# EAGLE board metaboard (EAGLE 5.10)
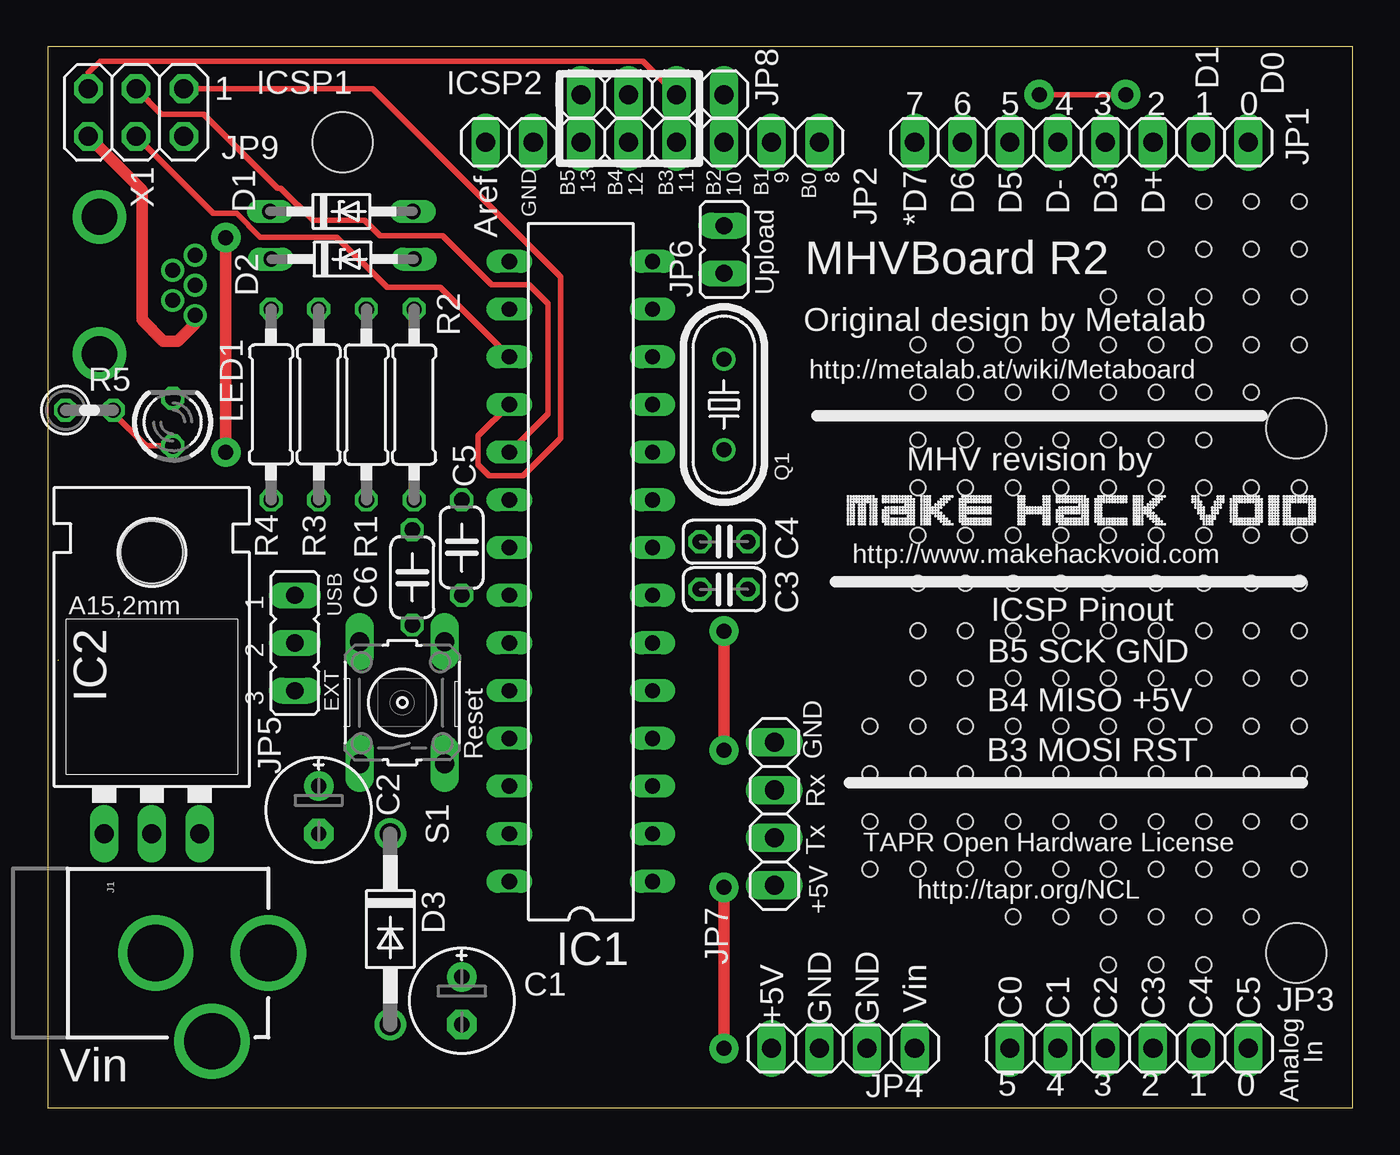
[diagram p0: board, top side]
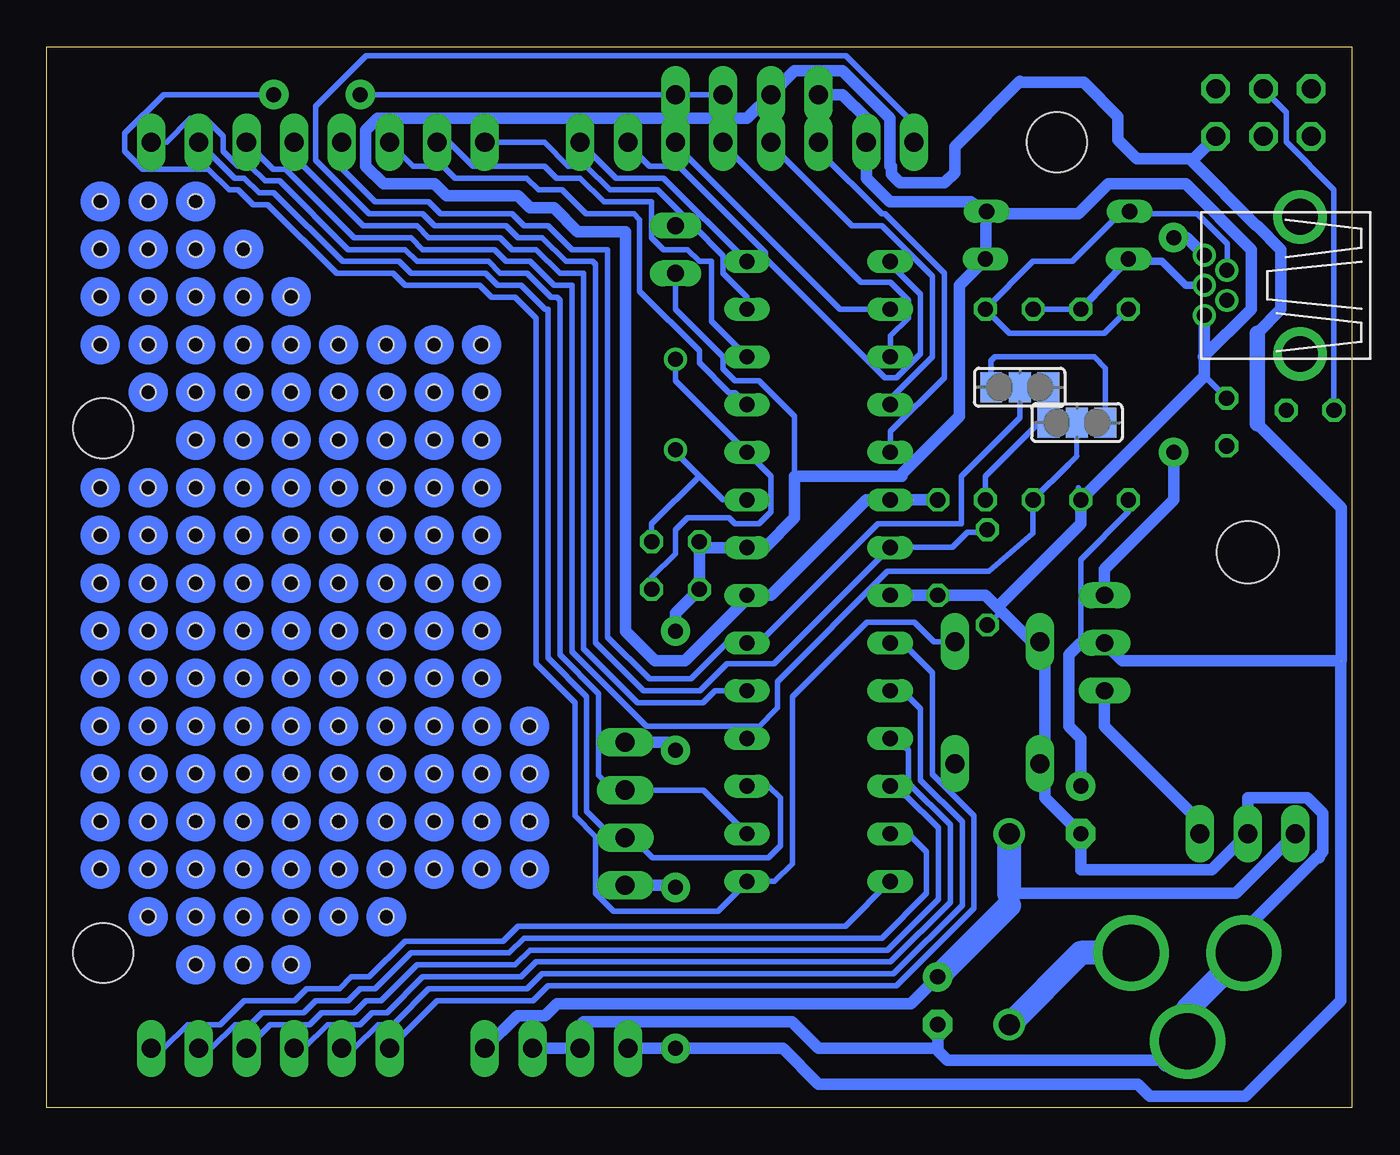
[diagram p1: board, bottom side, seen from below]

Size 69.52 x 56.51 mm. Coordinates in mm from the lower left corner, seen from the top.
Outline: 0,0 69.52,0 69.52,56.5 0,56.5 0,0
Copper layers (1*16): Top 0.035mm / dielectric 1.5mm / Bottom 0.035mm
Design rules "mine *": minimum track width 12mil, minimum drill 31mil, track to track 8mil, track to pad 8mil, pad to pad 8mil, via to via 8mil, smd to smd 8mil, copper to edge 10mil, drill to drill 20mil, minimum pad ring 8mil, minimum via ring 15mil, stop-mask expansion 4mil, vias tented up to drill 0mil, thermal gap 10mil
Holes 3.2 mm at 66.51,36.19 66.51,8.25 15.71,51.43
Holes 0.8 mm at 56.51,40.65 59.05,40.65 61.59,40.65 64.13,40.65 64.13,43.19 61.59,43.19 59.05,43.19 56.51,43.19 59.05,45.73 61.59,45.73 64.13,45.73 64.13,48.27 61.59,48.27 56.51,30.49 59.05,30.49 61.59,30.49 64.13,30.49 64.13,33.03 61.59,33.03 59.05,33.03 56.51,33.03 56.51,35.57 59.05,35.57 61.59,35.57 64.13,38.11 61.59,38.11 59.05,38.11 56.51,38.11 56.51,20.33 59.05,20.33 61.59,20.33 64.13,20.33 64.13,22.87 61.59,22.87 59.05,22.87 56.51,22.87 56.51,25.41 59.05,25.41 61.59,25.41 64.13,25.41 64.13,27.95 61.59,27.95 59.05,27.95 56.51,27.95 56.51,10.17 59.05,10.17 61.59,10.17 64.13,10.17 64.13,12.71 61.59,12.71 59.05,12.71 56.51,12.71 56.51,15.25 59.05,15.25 61.59,15.25 64.13,15.25 64.13,17.79 61.59,17.79 59.05,17.79 56.51,17.79 66.67,40.65 66.67,43.19 66.67,45.73 66.67,48.27 66.67,25.41 66.67,27.95 66.67,30.49 66.67,33.03 66.67,15.25 66.67,17.79 66.67,20.33 66.67,22.87 66.67,12.71 46.35,33.03 48.89,33.03 51.43,33.03 53.97,33.03 53.97,35.57 51.43,35.57 48.89,35.57 46.35,35.57 46.35,38.11 48.89,38.11 51.43,38.11 53.97,38.11 53.97,40.65 51.43,40.65 48.89,40.65 46.35,40.65 46.35,22.87 48.89,22.87 51.43,22.87 53.97,22.87 53.97,25.41 51.43,25.41 48.89,25.41 46.35,25.41 46.35,27.95 48.89,27.95 51.43,27.95 53.97,27.95 53.97,30.49 51.43,30.49 48.89,30.49 46.35,30.49 46.35,12.71 48.89,12.71 51.43,12.71 53.97,12.71 53.97,15.25 51.43,15.25 48.89,15.25 46.35,15.25 46.35,17.79 48.89,17.79 51.43,17.79 53.97,17.79 53.97,20.33 51.43,20.33 48.89,20.33 46.35,20.33 51.43,10.17 53.97,10.17 43.81,12.71 43.81,15.25 43.81,17.79 43.81,20.33 56.51,7.63 59.05,7.63 61.59,7.63
bRestrict: area 13,48.7 to 18.4,54.1

## Footprints (pad centres in the part's own frame; a part is rotated, then mirrored left to right if it is on the bottom)
E2,5-6E = drill 0.813 pad 1.575 round: + -1.27,0 | drill 0.813 pad 1.575 octagon: - 1.27,0
C025-024X044 = drill 0.813 octagon: 1 -1.27,0; 2 1.27,0
C050-024X044 = drill 0.813 octagon: 1 -2.54,0; 2 2.54,0
DO34Z7 = drill 0.813 long: A 3.81,0; C -3.81,0
DO41-10 = drill 1.118 round: A 5.08,0; C -5.08,0
DIL28-3 = drill 0.813 long: 1 -16.51,-3.81; 2 -13.97,-3.81; 3 -11.43,-3.81; 4 -8.89,-3.81; 5 -6.35,-3.81; 6 -3.81,-3.81; 7 -1.27,-3.81; 8 1.27,-3.81; 9 3.81,-3.81; 10 6.35,-3.81; 11 8.89,-3.81; 12 11.43,-3.81; 13 13.97,-3.81; 14 16.51,-3.81; 15 16.51,3.81; 16 13.97,3.81; 17 11.43,3.81; 18 8.89,3.81; 19 6.35,3.81; 20 3.81,3.81; 21 1.27,3.81; 22 -1.27,3.81; 23 -3.81,3.81; 24 -6.35,3.81; 25 -8.89,3.81; 26 -11.43,3.81; 27 -13.97,3.81; 28 -16.51,3.81
78XXL = drill 1.016 long: GND 0,-3.81; IN -2.54,-3.81; OUT 2.54,-3.81 | hole 3.302: 0,11.176
POWER_JACK_PTH = drill 2.997 round: GND 0,7.7; GNDBREAK 4.7,10.7; PWR 0,13.7
1X08 = drill 1.016 long: 1 -8.89,0; 2 -6.35,0; 3 -3.81,0; 4 -1.27,0; 5 1.27,0; 6 3.81,0; 7 6.35,0; 8 8.89,0
1X06 = drill 1.016 long: 1 -6.35,0; 2 -3.81,0; 3 -1.27,0; 4 1.27,0; 5 3.81,0; 6 6.35,0
1X04 = drill 1.016 long: 1 -3.81,0; 2 -1.27,0; 3 1.27,0; 4 3.81,0
JP2 = drill 0.914 long: 1 -2.54,0; 2 0,0; 3 2.54,0
JP1 = drill 0.914 long: 1 0,-1.27; 2 0,1.27
2X03 = drill 1.016 octagon: 1 -2.54,-1.27; 2 -2.54,1.27; 3 0,-1.27; 4 0,1.27; 5 2.54,-1.27; 6 2.54,1.27
LED3MM = drill 0.813 octagon: A -1.27,0; K 1.27,0
HC49/S = drill 0.813 round: 1 -2.413,0; 2 2.413,0
0207/10 = drill 0.813 octagon: 1 -5.08,0; 2 5.08,0
0207/2V = drill 0.813 octagon: 1 -1.27,0; 2 1.27,0
B3F-10XX = drill 1.016 long: 1 -3.251,2.261; 2 3.251,2.261; 3 -3.251,-2.261; 4 3.251,-2.261
SJ_2 = smd 1.168 x 1.6: 1 -1.524,0; 2 0,0; 3 1.524,0
USB-MB-H = drill 0.8 pad 1.143 round: D+ 5.1,0; D- 3.9,0.8; GND 5.1,-1.6; ID 3.9,-0.8; VBUS 5.1,1.6 | drill 1.9 round: P$6 0,-3.65; P$7 0,3.65

## Placement (x,y rotation side)
C1  10uF  [E2,5-6E]  22.06,5.71 270 top
C2  10uF  [E2,5-6E]  14.44,15.87 270 top
C3  22p  [C025-024X044]  36.03,27.62 0 top
C4  22p  [C025-024X044]  36.03,30.16 0 top
C5  100n  [C050-024X044]  22.06,29.84 90 top
C6  100n  [C050-024X044]  19.42,28.26 270 top
D1  3V6  [DO34Z7]  15.65,47.75 0 top
D2  3V6  [DO34Z7]  15.71,45.21 0 top
D3  1N4004  [DO41-10]  18.25,9.52 270 top
IC1  ATMEGA168-20P  [DIL28-3]  28.41,28.57 90 top
IC2  7805  [78XXL]  5.55,18.41 0 top
J1  POWER_JACKPTH  [POWER_JACK_PTH]  -1.94,8.25 270 top
JP1  [1X08]  55.08,51.43 180 top
JP2  [1X08]  32.22,51.43 180 top
JP3  [1X06]  57.62,3.17 0 top
JP4  [1X04]  42.38,3.17 0 top
JP5  [JP2]  13.17,24.76 270 top
JP6  [JP1]  36.03,45.72 0 top
JP7  TTL  [1X04]  38.72,15.66 90 top
JP8  [1X04]  32.22,53.97 180 top
JP9  [2X03]  4.71,53.01 180 top
LED1  [LED3MM]  6.67,36.53 90 top
Q1  16MHz  [HC49/S]  36.03,37.46 270 top
R1  68  [0207/10]  16.98,37.46 270 top
R2  68  [0207/10]  19.52,37.46 270 top
R3  1M  [0207/10]  14.44,37.46 90 top
R4  1k5  [0207/10]  11.9,37.46 90 top
R5  1k  [0207/2V]  2.22,37.16 0 top
S1  [B3F-10XX]  18.89,21.59 90 top
SJ1  [SJ_2]  17.69,38.37 180 bottom
SJ2  [SJ_2]  14.64,36.49 180 bottom
X1  USB-MB-H  [USB-MB-H]  2.76,43.81 0 top

## Library data of the parts
C1-C6 R1-R5 = rcl
D1-D3 = diode
IC1 = avr
IC2 = v-reg
J1 X1 = SparkFun
JP1-JP4 JP7-JP9 = pinhead
JP5 JP6 SJ1 SJ2 = jumper
LED1 = led
Q1 = crystal
S1 = switch-omron

## Nets
+5USB: JP5.1 X1.VBUS
+5V: C2.+ C5.2 IC1.7 IC1.20 JP4.1 JP5.2 JP7.1 JP8.3 JP9.2 R4.1
+VRAW: C1.+ D3.C IC2.IN JP4.4
D+: D2.C R1.1 R3.2 X1.D+
D-: D1.C R2.1 R4.2 X1.D-
GND: C1.- C2.- C3.1 C4.1 C5.1 C6.2 D1.A D2.A IC1.8 IC1.22 IC2.GND J1.GND J1.GNDBREAK JP2.7 JP4.2 JP4.3 JP6.1 JP7.4 JP8.4 JP9.6 LED1.K R3.1 S1.1 S1.2 X1.GND
N$1: LED1.A R5.2
N$2: IC1.1 JP8.1 JP8.2 JP9.5 S1.4
N$4: D3.A J1.PWR
N$6: IC1.2 JP1.1 JP7.3
N$8: IC2.OUT JP5.3
N$9: C3.2 IC1.10 Q1.1
N$10: C4.2 IC1.9 Q1.2
N$11: IC1.3 JP1.2 JP7.2
N$12: IC1.5 JP1.4
N$13: IC1.11 JP1.6
N$14: IC1.12 JP1.7
N$15: IC1.13 JP1.8 JP6.2
N$16: IC1.23 JP3.1
N$17: IC1.24 JP3.2
N$18: IC1.25 JP3.3
N$19: IC1.26 JP3.4
N$20: IC1.27 JP3.5
N$21: IC1.28 JP3.6
N$22: IC1.14 JP2.1
N$23: IC1.15 JP2.2
N$24: IC1.16 JP2.3
N$25: IC1.17 JP2.4 JP9.4
N$26: IC1.18 JP2.5 JP9.1
N$27: IC1.19 JP2.6 JP9.3 R5.1
N$28: C6.1 IC1.21 JP2.8
N$189: IC1.4 JP1.3 R1.2 SJ1.3 SJ2.1 SJ2.2
N$190: IC1.6 JP1.5 R2.2 SJ1.1 SJ1.2 SJ2.3

## Tracks (layer width: path | path; a pad name or v marks a point on that pad's centre or on a via)
+5USB  (via drill 0.8)
  Top 0.61: v9.49,34.92 v9.49,46.35
  Bottom 0.406: v9.49,46.35 8.8,46.35
  Bottom 0.61: JP5.1 13.17,28.7 9.49,32.38 v9.49,34.92 | 8.8,46.35 X1.VBUS
+5V  (via drill 0.8)  (1 unrouted)
  Top 0.61: v36.03,3.17 v36.03,11.74
  Bottom 0.305: 14.44,24.76 14.44,29.2 11.9,31.75 R4.1 | 12.98,24.76 12.66,25.08
  Bottom 0.61: JP4.1 v36.03,3.17 30.32,3.17 28.41,1.26 11.39,1.26 10.76,0.63 5.68,0.63 0.6,5.71 0.6,23.81 12.22,23.81 JP5.2 | C2.+ 14.44,19.68 15.08,20.31 15.08,24.13 14.44,24.76 JP5.2 | JP5.2 12.98,24.76 | C5.2 IC1.20 25.87,32.38 30.95,27.3 IC1.7 32.22,27.11 35.52,23.81 37.11,23.81 38.7,25.4 38.7,46.67 41.24,46.67 42.51,47.94 43.78,47.94 44.41,48.57 48.22,48.57 48.86,49.21 51.59,49.21 52.54,50.16 52.54,52.07 51.91,52.7 32.22,52.7 JP8.3 29.68,55.24 27.14,55.24 24.6,52.7 24.6,50.16 24.54,50.16 24.54,49.73 24.07,49.27 21.7,49.27 21.15,49.82 21.15,51.19 17.68,54.67 17.62,54.61 14.28,54.61 12.46,52.8 12.46,51.57 11.46,50.56 8.65,50.56 8.53,50.43 | 5.04,41.27 3.77,42.54 3.77,45.72 5.04,46.98 5.08,46.98 8.53,50.43 | JP7.1 36.14,11.85 v36.03,11.74 | JP9.2 7.25,51.71 8.53,50.43 | 5.04,36.42 0.57,31.95 0.57,23.84
  Bottom 0.813: 5.04,36.42 5.04,41.27
+VRAW
  Bottom 0.305: 18.25,11.42 18.25,10.79
  Bottom 0.61: IC2.IN 6.19,11.42 18.25,11.42 | C1.+ 23.49,5.55 42.35,5.55 42.98,4.92 44.44,4.92 JP4.4
  Bottom 1.27: 18.25,11.42 D3.C | 18.25,10.79 C1.+
D+
  Bottom 0.305: R3.2 R1.1
  Bottom 0.406: X1.D+ 8.85,43.81 10.12,45.08 11.77,45.08 D2.C R3.2
D-
  Bottom 0.305: 11.88,42.56 R4.2 13.17,41.27 18.25,41.27 R2.1 16.98,45.08 14.88,45.08 12.22,47.75 D1.C 11.71,47.62 8.22,47.62 6.63,46.03 6.63,44.76 X1.D-
GND  (via drill 0.8)
  Top 0.61: v36.03,25.4 v36.03,19.04 | X1.GND 7.86,41.77 6.93,40.84 6.16,40.84 5.02,41.98 5.02,48.88 JP9.6
  Bottom 0.305: JP6.1 36.03,42.54 33.49,40 33.49,39.36 32.86,38.73 31.59,38.73 29.68,36.82 29.68,33.65 | 34.76,29.84 C4.1 | 1.87,13.33 1.74,13.33 | 14.57,33.01 14.57,32.38 R3.1 | D1.A 19.33,47.94 | 7.86,40 7.9,40 | C6.2 19.37,25.73 18.66,26.44 | LED1.K 7.78,38.91 7.86,38.96
  Bottom 0.61: IC1.22 C5.1 19.52,27.3 18.89,26.66 | S1.2 16.9,24.84 16.98,24.76 | 16.98,24.76 18.66,26.44 18.89,26.66 | 16.98,24.76 16.35,24.13 16.35,18.41 | S1.1 16.42,18.33 16.35,18.41 | 16.35,18.41 16.35,16.5 C2.- 14.44,12.69 7.46,12.69 IC2.GND 5.55,16.5 2.38,16.5 1.55,15.68 1.55,13.65 1.74,13.46 1.74,13.33 | 22.06,3.17 28.41,3.17 29.84,4.6 40.92,4.6 41.11,4.41 JP4.2 JP4.3 | 22.06,3.17 C1.- | 18.89,26.66 14.44,31.11 R3.1 7.86,38.96 7.86,40 X1.GND | v36.03,25.4 36.03,26.35 C3.1 34.76,29.84 IC1.8 31.27,29.84 29.68,31.43 29.68,33.65 23.97,33.65 23.97,33.78 20.92,36.82 20.92,43.81 D2.A D1.A | JP8.4 27.14,53.97 25.87,52.7 JP2.7 25.87,49.53 24.6,48.25 20.28,48.25 D1.A | 7.9,40 5.36,42.54 5.36,45.72 8.85,49.21 12.98,49.21 14.57,47.62 19.33,47.62 D1.A | 22.06,3.17 22.06,3.04 21.55,2.53 9.77,2.53 | 5.76,9.44 1.87,13.33 | JP7.4 36.46,19.47 v36.03,19.04
  Bottom 1.27: 9.77,2.53 J1.GNDBREAK 8.76,5.25 J1.GND 5.76,9.44
N$1
  Top 0.305: LED1.A 6.51,35.26 5.24,35.26 3.49,37 R5.2
N$2  (via drill 0.8)
  Top 0.305: v57.43,53.97 v52.83,53.97 | JP9.5 2.17,55.13 2.79,55.75 31.71,55.75 JP8.2
  Bottom 0.305: S1.4 22.26,24.84 23.3,25.87 25.84,25.87 29.81,21.9 29.81,13.01 30.76,12.06 IC1.1 32.22,12.03 33.78,10.47 39.33,10.47 40.28,11.42 40.28,14.44 41.4,15.55 41.4,21.59 43.46,23.65 43.46,42.06 44.57,43.18 45.84,43.18 46.48,43.81 50.44,43.81 51.08,44.44 54.1,44.44 57.75,48.1 | JP8.2 33.62,53.97 36,53.97 JP8.1 52.03,53.97 v52.83,53.97 | v57.43,53.97 57.59,53.97 63.3,53.97 65.37,51.91 65.37,50.95 64.41,50 60.92,50 59.81,48.89 59.33,48.89 58.54,48.1 57.75,48.1 | 57.75,48.1
N$4
  Bottom 1.27: D3.A 14.44,8.25 J1.PWR
N$6
  Bottom 0.305: JP1.1 63.94,51.43 63.14,51.43 61.87,52.7 61.08,52.7 60.13,51.75 60.13,50.95 59.33,50.16 58.7,50.16 57.91,49.37 57.11,49.37 53.46,45.72 50.44,45.72 49.81,45.08 46,45.08 45.36,44.44 43.94,44.44 42.67,43.18 42.35,43.18 42.19,43.02 42.19,24.13 40.13,22.06 40.13,17.71 39.35,16.93 JP7.3 34.55,16.93 IC1.2
N$8
  Bottom 0.61: JP5.3 13.17,20.31 8.09,15.24 IC2.OUT
N$9
  Bottom 0.305: Q1.1 36.03,38.73 IC1.10 30.95,33.65 30.95,31.75 31.59,31.11 32.86,31.11 33.17,31.43 35.4,31.43 36.03,30.79 36.03,29.52 37.3,28.25 C3.2
N$10
  Bottom 0.305: IC1.9 33.49,32.38 34.76,33.65 | 34.76,33.65 36.03,34.92 Q1.2 | C4.2 37.3,31.11 34.76,33.65
N$11
  Bottom 0.305: IC1.3 31.08,17.14 30.44,16.5 30.44,13.97 31.08,13.33 37.27,13.33 38.33,14.39 JP7.2 39.35,14.39 40.76,15.8 40.76,21.9 42.82,23.97 42.82,42.54 42.98,42.54 44.25,43.81 45.52,43.81 46.16,44.44 50.13,44.44 50.76,45.08 53.78,45.08 57.43,48.73 58.22,48.73 59.02,49.53 59.53,49.53 JP1.2 61.4,51.27
N$12
  Bottom 0.305: IC1.5 33.93,22.22 34.57,21.59 38.06,21.59 40.92,24.44 40.92,44.44 42.19,44.44 43.46,45.72 44.73,45.72 45.36,46.35 49.17,46.35 49.81,46.98 52.67,46.98 56.32,50.64 56.32,51.4 JP1.4
N$13
  Bottom 0.305: IC1.11 32.86,38.1 33.17,38.1 34.76,39.68 34.76,40.32 37.94,43.49 37.94,47.3 38.25,47.62 40.79,47.62 42.06,48.89 43.33,48.89 43.97,49.53 47.78,49.53 48.41,50.16 50,50.16 JP1.6
N$14
  Bottom 0.305: JP1.7 48.1,51.43 46.83,50.16 43.02,50.16 42.38,49.53 41.11,49.53 39.84,48.25 37.3,48.25 37.3,46.35 36.67,45.72 35.4,45.72 34.76,45.08 34.13,45.08 34.13,41.9 IC1.12
N$15
  Bottom 0.305: IC1.13 32.22,43.18 33.49,44.44 33.49,45.4 35.08,46.98 | 35.08,46.98 JP6.2 | JP1.8 43.02,51.43 41.75,50.16 40.79,50.16 39.52,48.89 36.98,48.89 35.08,46.98
N$16
  Bottom 0.305: JP3.1 48.73,5.71 43.62,5.71 42.82,6.5 24.25,6.5 20.12,10.63 20.12,15.55 22.35,17.77 22.35,23.17 23.93,24.76 IC1.23
N$17
  Bottom 0.305: 50.92,4.6 49.17,6.34 43.94,6.34 43.14,7.14 24.41,7.14 20.76,10.79 20.76,15.24 22.98,17.46 22.98,21.27 23.93,22.22 IC1.24 | 50.92,4.6 | 50.92,4.6 51.08,4.44 51.87,4.44 53.14,3.17 JP3.2
N$18
  Bottom 0.305: 56.32,3.17 JP3.3 55.84,3.17 54.57,4.44 52.83,4.44 52.19,5.07 51.4,5.07 49.49,6.98 44.25,6.98 43.46,7.77 24.57,7.77 21.39,10.95 21.39,15.08 23.62,17.3 23.62,19.04 24.25,19.68 IC1.25
N$19
  Bottom 0.305: 49.97,7.46 51.56,5.87 | 49.97,7.46 | 49.97,7.46 49.81,7.62 44.57,7.62 43.78,8.41 24.73,8.41 22.03,11.11 22.03,14.92 23.77,16.66 24.12,16.66 IC1.26 | 51.56,5.87 | 51.56,5.87 51.71,5.71 52.51,5.71 53.14,5.07 54.89,5.07 55.52,4.44 57.62,4.44 JP3.4
N$20
  Bottom 0.305: JP3.5 60.76,3.17 59.49,4.44 58.7,4.44 58.06,5.07 55.84,5.07 55.37,5.55 55.21,5.71 53.46,5.71 52.83,6.34 52.03,6.34 50.13,8.25 44.89,8.25 44.09,9.04 25.04,9.04 22.66,11.42 22.66,13.65 23.62,14.6 IC1.27
N$21
  Bottom 0.305: JP3.6 63.3,3.17 62.03,4.44 60.29,4.44 59.02,5.71 56.32,5.71 55.68,6.34 53.94,6.34 53.3,6.98 52.35,6.98 50.44,8.89 45.21,8.89 44.41,9.68 26.98,9.68 IC1.28
N$22
  Bottom 0.305: IC1.14 36.67,49.53 39.21,49.53 JP2.1
N$23
  Bottom 0.305: IC1.15 24.57,44.92 22.98,43.33 22.98,40.16 24.25,38.89 24.89,38.89 31.24,45.24 31.24,45.56 35.84,50.16 37.43,50.16 38.54,51.27 JP2.2
N$24
  Bottom 0.305: IC1.16 24.73,42.54 27.27,42.54 36,51.27 JP2.3
N$25
  Top 0.305: IC1.17 20.89,43.71 18.07,43.71 15.4,46.38 11.32,46.38 10.06,47.64 8.81,47.64 JP9.4
  Bottom 0.305: IC1.17 24.57,40 24.57,41.11 23.62,42.06 23.62,43.02 24.57,43.97 26.16,43.97 33.46,51.27 JP2.4
N$26
  Top 0.305: JP9.1 17.31,54.28 27.33,44.26 27.33,35.65 25.33,33.66 23.52,33.66 22.93,34.24 22.93,35.79 IC1.18
  Bottom 0.305: IC1.18 24.57,37.46 24.57,37.78 22.35,40 22.35,44.29 25.04,46.99 26.63,46.99 30.92,51.27 JP2.5
N$27
  Top 0.305: IC1.19 26.65,36.97 26.65,42.82 25.63,43.84 23.65,43.84 21.04,46.45 17.7,46.45 16.89,47.26 14.14,47.26 12.42,48.99 12.25,48.99 8.31,52.93 6.04,52.93 4.71,54.27 JP9.3
  Bottom 0.305: IC1.19 24.57,34.92 24.57,36.03 21.71,38.89 21.71,44.45 24.89,47.62 25.04,47.62 28.38,50.95 28.38,51.27 JP2.6 | R5.1 0.95,48.91 3.49,51.45 3.49,53.04 4.6,54.15 JP9.3 | R5.1
N$28
  Bottom 0.305: 23.14,51.43 JP2.8 22.82,51.91 26.95,56.03 52.51,56.03 55.21,53.34 55.21,50.48 52.35,47.62 49.49,47.62 48.86,46.98 45.05,46.98 44.41,46.35 43.14,46.35 41.87,45.08 40.44,45.08 40.28,44.92 40.28,24.76 37.74,22.22 34.73,22.22 33.3,23.65 30.79,23.65 IC1.21 24.45,29.86 21.27,29.86 20.48,30.65 19.52,30.65 C6.1
N$189
  Bottom 0.254: 15.08,34.29 14.64,34.72 SJ2.2
  Bottom 0.305: 15.08,34.29 R1.2 16.98,30.6 19.33,28.57 24.73,28.57 30.6,22.7 30.6,21.3 31.65,20.25 | SJ1.3 19.22,39.8 19.01,40 13.72,40 13.12,39.4 SJ2.1 | SJ2.2 14.88,36.19 | 31.65,20.25 IC1.4 | 58.86,51.27 JP1.3 57.46,50 56.79,50 53.14,46.35 50.13,46.35 49.49,45.72 45.68,45.72 45.05,45.08 43.78,45.08 42.51,43.81 41.55,43.81 41.55,24.28 37.59,20.32 31.71,20.32 31.65,20.25
  Bottom 0.406: SJ2.2 SJ2.1
N$190
  Bottom 0.305: SJ1.1 16.29,38.73 16.17,38.6 SJ1.1 | 16.17,38.27 SJ2.3 16.68,36.49 19.52,33.65 R2.2 | SJ1.2 17.69,36.75 20.79,33.65 20.79,31.11 25.24,31.11 31.59,24.76 IC1.6 33.3,24.76 35.2,22.86 37.43,22.86 39.65,25.08 39.65,45.72 41.55,45.72 42.82,46.98 44.09,46.98 44.73,47.62 48.54,47.62 49.17,48.25 52.03,48.25 53.81,50.03 JP1.5 | 16.17,38.27 SJ1.1 | 16.17,38.27 16.27,38.37
  Bottom 0.406: 16.27,38.37 SJ1.2
(copper drawn outside any net)
  shapes: Bottom circle x130

## Text on the board
tPlace: D1 | D0 | 7 | 6 | 5 | 4 | 3 | 2 | 1 | 0 | B5 | B4 | B3 | B2 | B1 | 9 | 8 | B0 | D6 | D5 | D- | D3 | D+ | GND | *D7 | Aref | MHVBoard R2 | Upload | Reset | Vin | C0 | C1 | C2 | C3 | C4 | C5 | +5V | GND | GND | Vin | 5 | 4 | 3 | 2 | 1 | 0
tNames: 1 | ICSP1 | ICSP2 | 13 | 12 | 11 | 10 | Original design by Metalab | http://metalab.at/wiki/Metaboard | MHV revision by | A:/eagle/Metaboard-MHV/mhv.bmp | http://www.makehackvoid.com | USB | ICSP Pinout | B5 SCK GND | EXT | B4 MISO +5V | GND | B3 MOSI RST | Rx | TAPR Open Hardware License | Tx | http://tapr.org/NCL | +5V | In | Analog